# Altium PCB MGNGSQ4_Extender.PcbDoc
Units mil, origin at the board's own origin, x right, y up, seen from the top; angles counter-clockwise.
Board outline 2275 x 2755 mil, 4 copper layers (Top Layer, Internal Plane 1, Internal Plane 2, Bottom Layer), stack 30.634 mil thick; 5 components, 37 nets, 89 pads, 0 vias.
Unrouted connection lines stored in the file: 2.
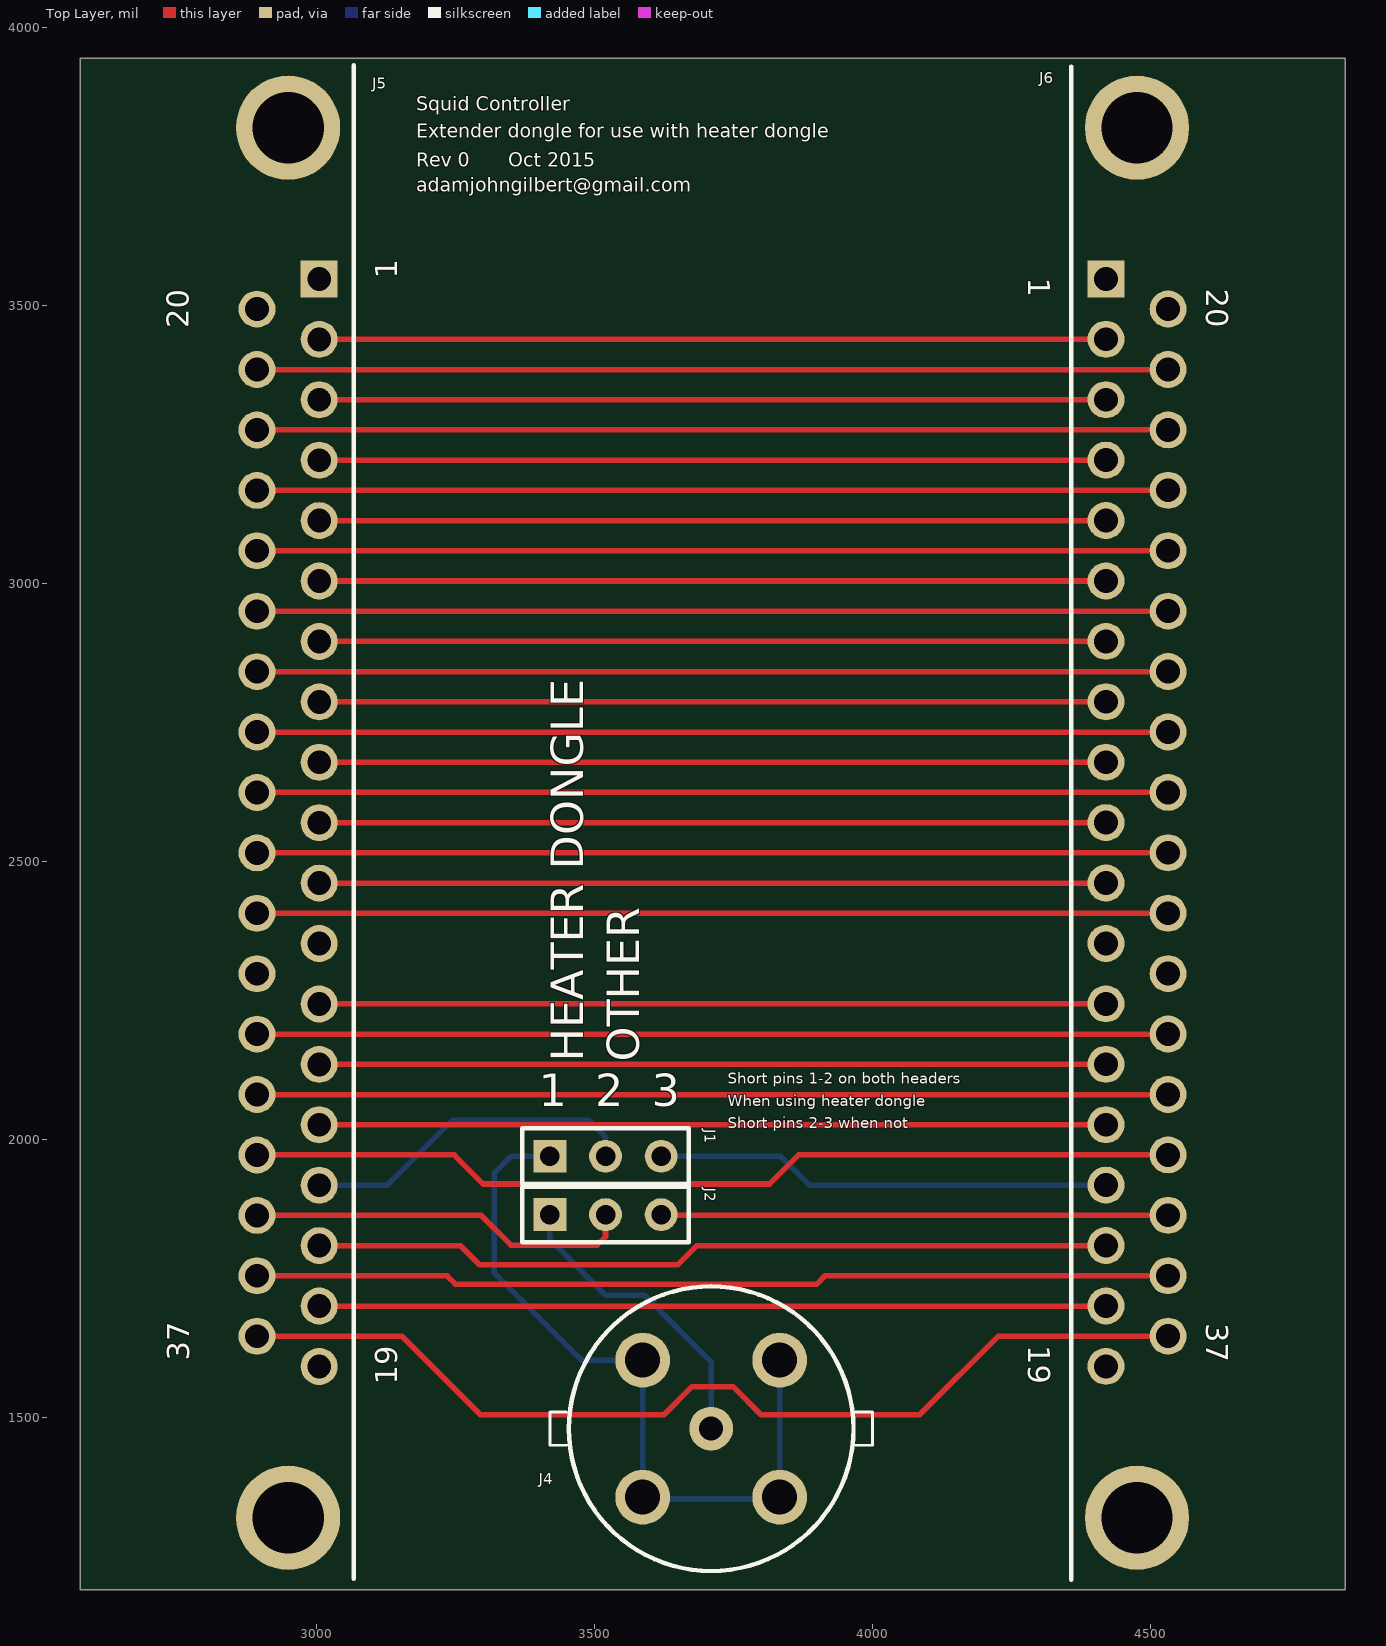
[diagram p0: Top Layer view]
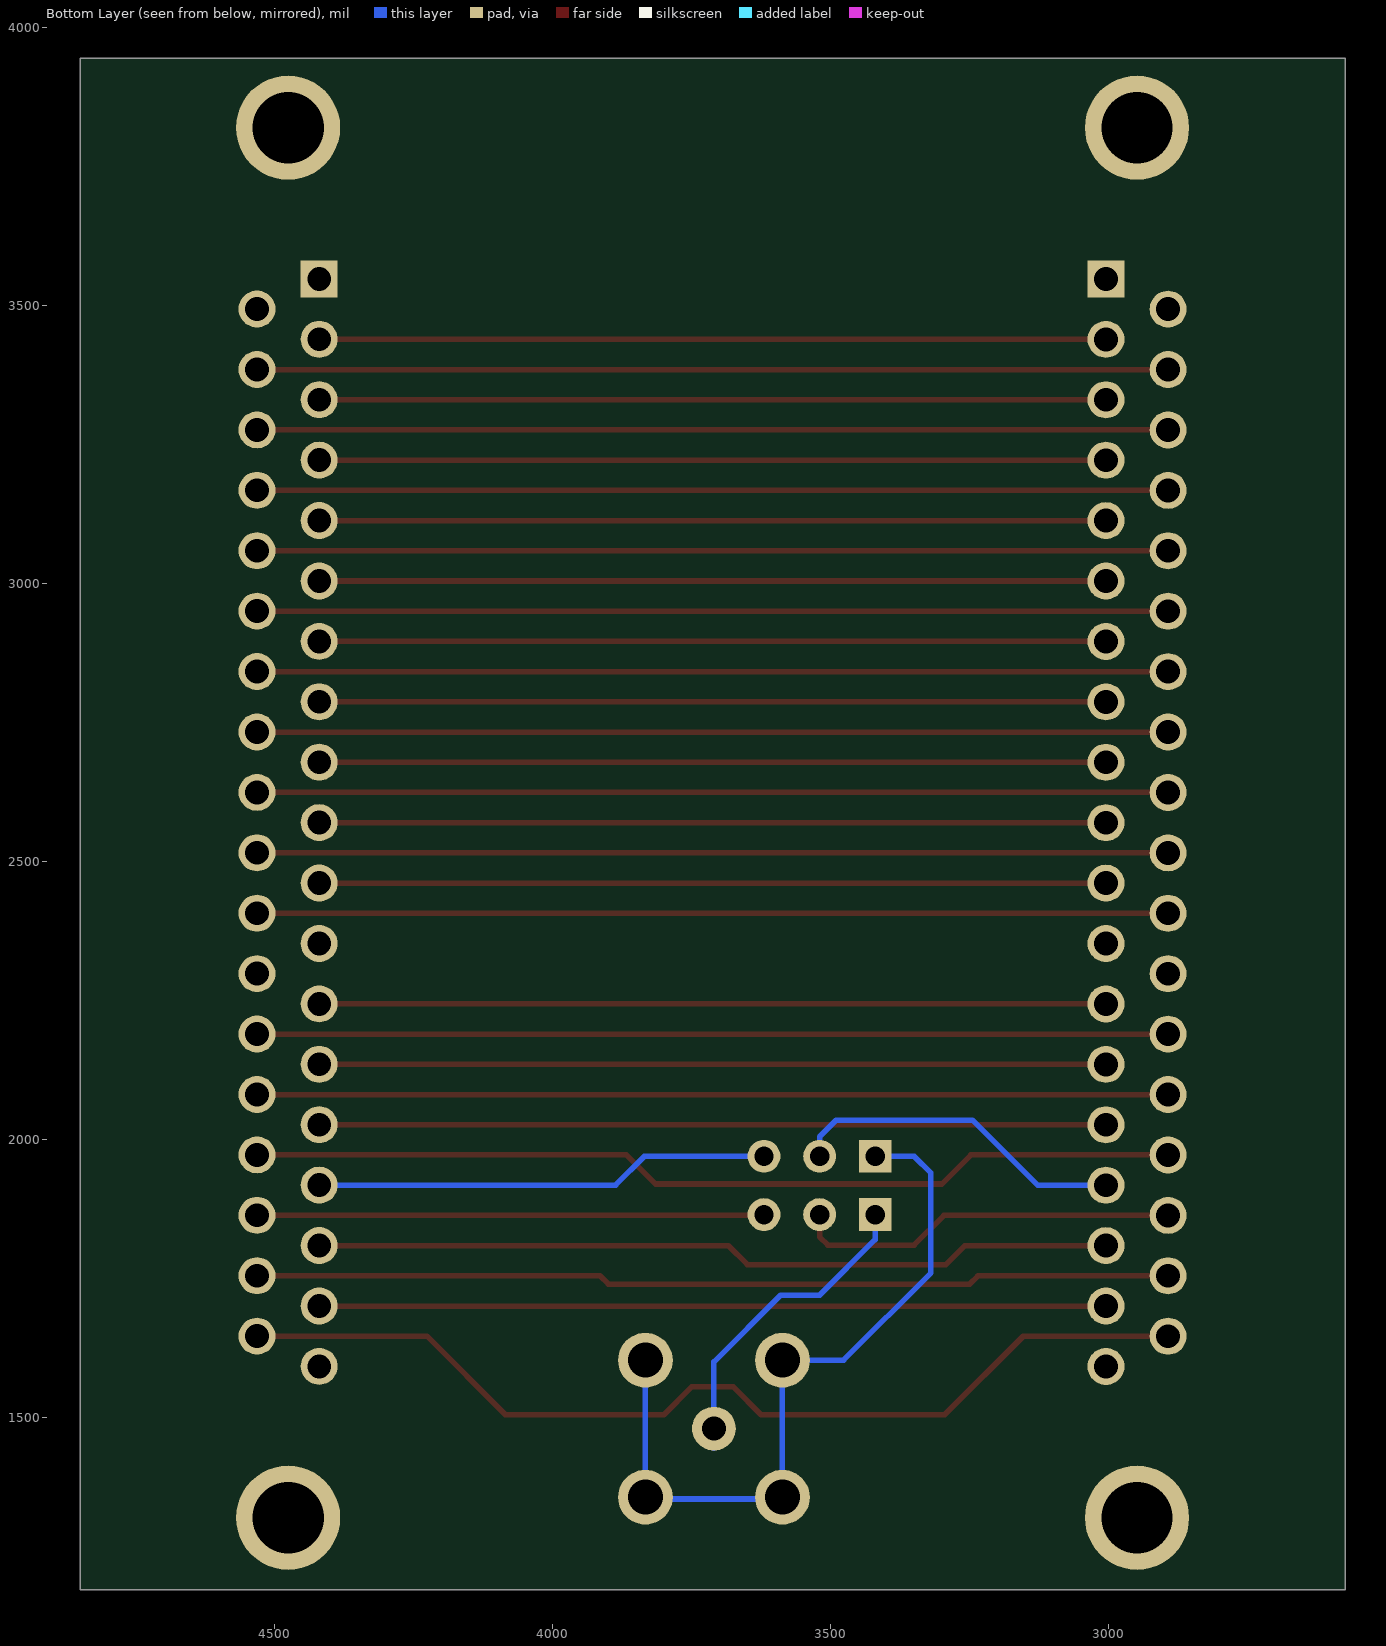
[diagram p1: Bottom Layer view, seen from below]
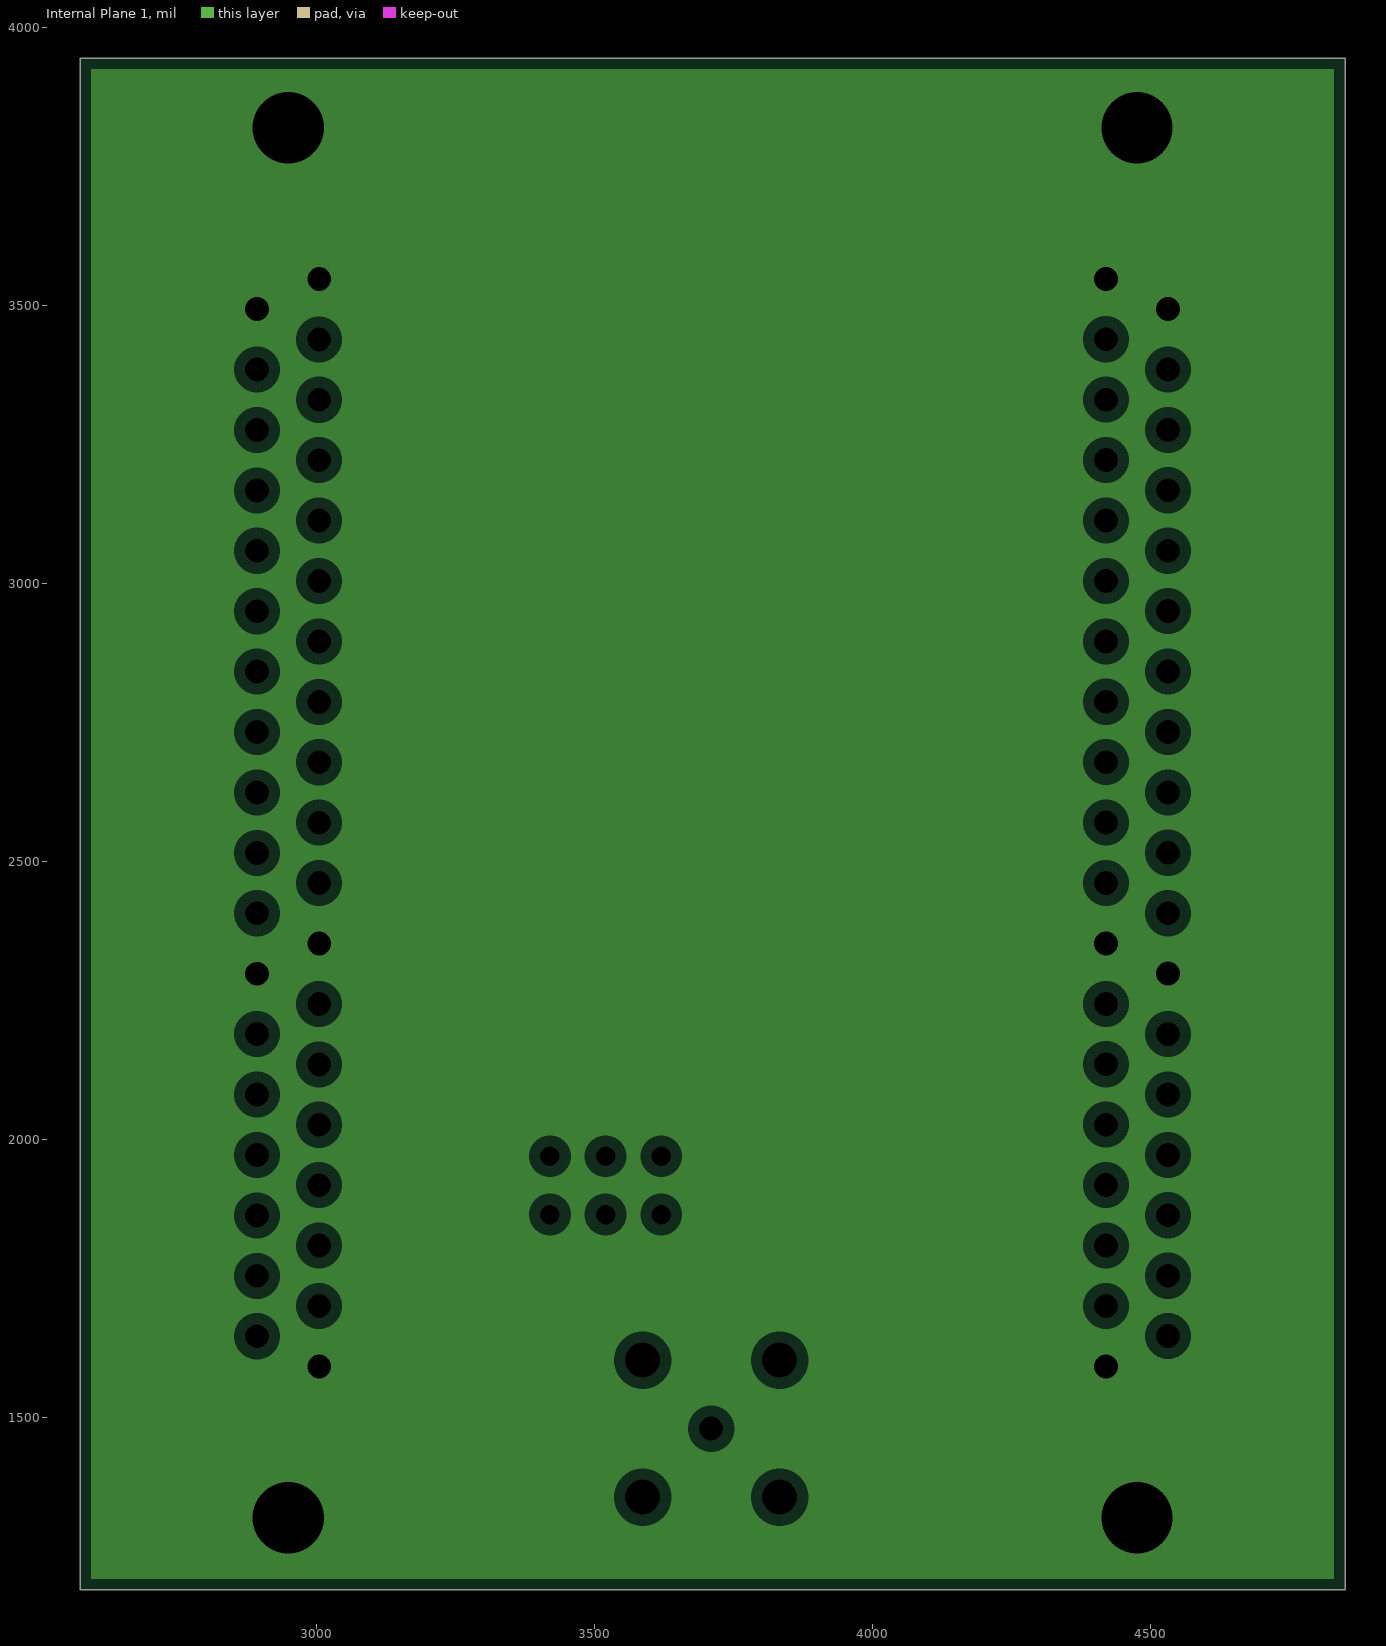
[diagram p2: Internal Plane 1, clearances drawn from the general rule]
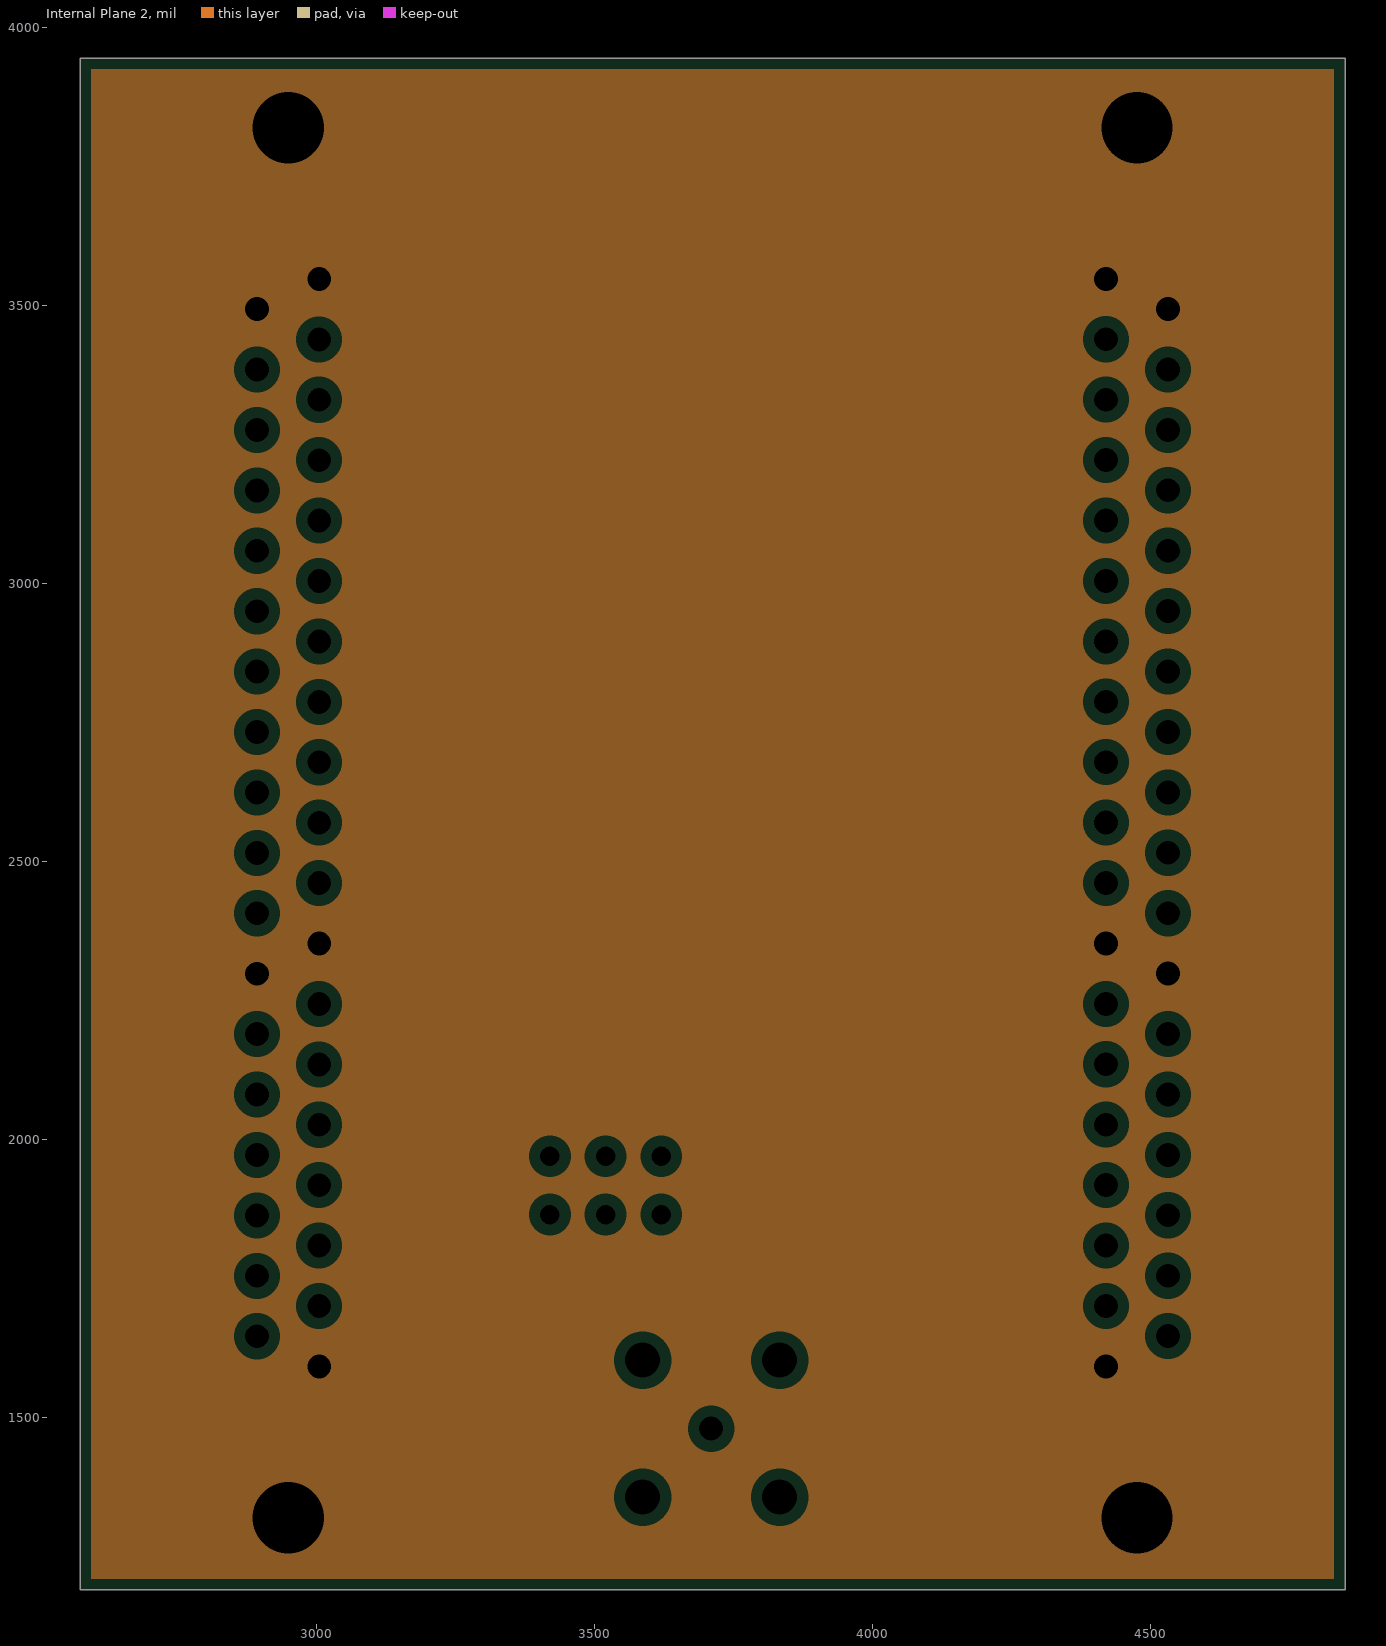
[diagram p3: Internal Plane 2, clearances drawn from the general rule]

## Layer stack, top to bottom
Top Solder: solder mask 0.4, Solder Resist, Dk 3.5
Top Layer: signal copper 1.4
Dielectric 1: core 10, FR-4, Dk 4.2
Internal Plane 1: plane copper 1.417, net GND
Dielectric 3: prepreg 5, Dk 4.2
Internal Plane 2: plane copper 1.417, net GND
Dielectric 2: core 10, Dk 4.2
Bottom Layer: signal copper 1.4
Bottom Solder: solder mask 0.4, Solder Resist, Dk 3.5

## Board outline
2575,1190 4850,1190 4850,3945 2575,3945

## Design rules (kind name [scope] priority, off if disabled: settings)
Clearance [All] p1: gap=10
HoleSize [All] p1: absolutevalues=TRUE maxlimit=200 minlimit=1 maxpercent=80.000 minpercent=20.000
PlaneClearance [All] p1: clearance=20
PlaneConnect [All] p1: planeconnectstyle=Relief reliefexpansion=20 reliefentries=4 reliefconductorwidth=10 reliefairgap=10
PolygonConnect [All] p1: connectstyle=Relief reliefconductorwidth=10 reliefentries=4 polygonreliefangle="90 Angle" airgapwidth=10
RoutingVias [All] p1: holewidth=28 width=50 viastyle="Through Hole" minholewidth=28 minwidth=50 maxholewidth=28 maxwidth=50
SolderMaskExpansion [All] p1: expansion=4
Width [All] p1: maxlimit=10 minlimit=10 preferedwidth=10
27 further rules are at their usual default settings.

## Components (designator, comment, footprint, x,y, rotation, side; value= is the part's Value field where it differs from the comment)
J1 "Header 3pin 0.1\"" HDR1X3 3420,1970 r0 top
J2 "Header 3pin 0.1\"" HDR1X3 3420,1865 r0 top
J4 "Vertical BNC" BNCVert 3710,1480 r180 top
J5 "DB37M" DSUB37-M 2949.09,3819.92 r90 top
J6 "DB37F" DSUB37-F 4420,2570 r270 top

## Footprints (in the part's own frame and the unit in brackets; to place one, negate y for a bottom-side part, rotate by r counter-clockwise, add the part's x,y. Pads: shape width x height; smd on the part's side, far side on the other; paste and mask are expansions set on the pad)
BNCVert [mm] "BNCVert"
  round 2.5 hole 1.6: 0(-3.13,3.13) 0(-3.13,-3.13) 0(3.13,3.13) 0(3.13,-3.13)
  round 2 hole 1.1: 1(0,0)
  silkscreen extent -7.37,-6.5 7.37,6.5
DSUB37-F [mm] "DSUB 37Pin Male"
  rect 1.69x1.69 hole 1.09: 1(-24.84,0)
  round 1.69 hole 1.09: 2(-22.08,0) 3(-19.32,0) 4(-16.56,0) 5(-13.8,0) 6(-11.04,0) 7(-8.28,0) 8(-5.52,0) 9(-2.76,0) 10(0,0) 11(2.76,0) 12(5.52,0) 13(8.28,0) 14(11.04,0) 15(13.8,0) 16(16.56,0) 17(19.32,0) 18(22.08,0) 19(24.84,0) 20(-23.461,2.84) 21(-20.701,2.84) 22(-17.941,2.84) 23(-15.181,2.84) 24(-12.421,2.84) 25(-9.661,2.84) 26(-6.901,2.84) 27(-4.141,2.84) 28(-1.381,2.84) 29(1.379,2.84) 30(4.139,2.84) 31(6.899,2.84) 32(9.659,2.84) 33(12.419,2.84) 34(15.179,2.84) 35(17.939,2.84) 36(20.699,2.84) 37(23.459,2.84)
  round 4.76 hole 3.26: 38(31.752,1.42) 39(-31.748,1.42)
  silkscreen extent -34.54,-1.58 34.6,-1.58
DSUB37-M [mm] "DSUB 37Pin Male"
  rect 1.69x1.69 hole 1.09: 1(-6.912,-1.42)
  round 1.69 hole 1.09: 2(-9.672,-1.42) 3(-12.432,-1.42) 4(-15.192,-1.42) 5(-17.952,-1.42) 6(-20.712,-1.42) 7(-23.472,-1.42) 8(-26.232,-1.42) 9(-28.992,-1.42) 10(-31.752,-1.42) 11(-34.512,-1.42) 12(-37.272,-1.42) 13(-40.032,-1.42) 14(-42.792,-1.42) 15(-45.552,-1.42) 16(-48.312,-1.42) 17(-51.072,-1.42) 18(-53.832,-1.42) 19(-56.592,-1.42) 20(-8.291,1.42) 21(-11.051,1.42) 22(-13.811,1.42) 23(-16.571,1.42) 24(-19.331,1.42) 25(-22.091,1.42) 26(-24.851,1.42) 27(-27.611,1.42) 28(-30.371,1.42) 29(-33.131,1.42) 30(-35.891,1.42) 31(-38.651,1.42) 32(-41.411,1.42) 33(-44.171,1.42) 34(-46.931,1.42) 35(-49.691,1.42) 36(-52.451,1.42) 37(-55.211,1.42)
  round 4.76 hole 3.26: 38(0,0) 39(-63.5,0)
  silkscreen extent -66.29,-3 2.84,-3
HDR1X3 [mm]
  rect 1.5x1.5 hole 0.889: 1(0,0)
  round 1.5 hole 0.889: 2(2.54,0) 3(5.08,0)
  silkscreen extent -1.27,-1.27 6.35,1.27

## Part data
J1 J2: library part Header3, "Header, 0.1\", 3-Pin straight"
J4: library part BNCVertical

## Nets (pads, with @x,y where several pads share a name; then routed paths per layer and width w, separated by ;. In a path a pad name is that pad's centre, name@x,y a point inside that pad or via, vN(x,y) a via of type N, cw(c..) or ccw(c..) an arc to the next point about the centre after c; other vN are vias at no path point)
GND: J5.1 J5.12 J5.19 J5.20 J5.31 J5.38 J5.39 J6.1 J6.12 J6.19 J6.20 J6.31 J6.38 J6.39
NetJ1_1: J1.1 J4.0 | length 1366.7
  Bottom Layer w10: J1.1 3350,1970 3320,1940 3320,1760 3476.77,1603.23 3586.77,1603.23 3586.77,1353.54 3833.23,1353.54 J4.0@3833.23,1600
NetJ1_2: J1.2 J5.16 | length 610.9
  Bottom Layer w10: J5.16 3127.88,1917.88 3245,2035 3490,2035 3520,2005 J1.2
NetJ1_3: J1.3 J6.16 | length 821.5
  Bottom Layer w10: J1.3 3835,1970 3886.97,1918.03 J6.16
NetJ2_1: J2.1 J4.1 | length 581.1
  Bottom Layer w10: J2.1 3420,1820 3520,1720 3590,1720 3710,1600 J4.1@3710,1445
NetJ2_2: J2.2 J5.35 | length 695.2
  Top Layer w10: J5.35 3296.42,1863.58 3350,1810 3505,1810 3520,1825 J2.2
NetJ2_3: J2.3 J6.35 | length 912.3
  Top Layer w10: J2.3 3621.26,1863.74 J6.35
NetJ5_2: J5.2 J6.2 | length 1415
  Top Layer w10: J5.2 J6.2@4420,3439.13
NetJ5_3: J5.3 J6.3 | length 1415
  Top Layer w10: J5.3 J6.3@4420,3330.47
NetJ5_4: J5.4 J6.4 | length 1415
  Top Layer w10: J5.4 J6.4@4420,3221.81
NetJ5_5: J5.5 J6.5 | length 1415
  Top Layer w10: J5.5 J6.5@4420,3113.15
NetJ5_6: J5.6 J6.6 | length 1415
  Top Layer w10: J5.6 J6.6@4420,3004.49
NetJ5_7: J5.7 J6.7 | length 1415
  Top Layer w10: J5.7 J6.7@4420,2895.83
NetJ5_8: J5.8 J6.8 | length 1415
  Top Layer w10: J5.8 J6.8@4420,2787.17
NetJ5_9: J5.9 J6.9 | length 1415
  Top Layer w10: J5.9 J6.9@4420,2678.51
NetJ5_10: J5.10 J6.10 | length 1415
  Top Layer w10: J5.10 J6.10@4420,2569.84
NetJ5_11: J5.11 J6.11 | length 1415
  Top Layer w10: J5.11 J6.11@4420,2461.18
NetJ5_13: J5.13 J6.13 | length 1415
  Top Layer w10: J5.13 J6.13@4420,2243.86
NetJ5_14: J5.14 J6.14 | length 1415
  Top Layer w10: J5.14 J6.14@4420,2135.2
NetJ5_15: J5.15 J6.15 | length 1415
  Top Layer w10: J5.15 J6.15@4420,2026.54
NetJ5_17: J5.17 J6.17 | length 1443.3
  Top Layer w10: J5.17 3258.71,1809.21 3292.92,1775 3650,1775 3684.21,1809.21 J6.17@4420,1809.21
NetJ5_18: J5.18 J6.18 | length 1415
  Top Layer w10: J5.18 J6.18@4420,1700.55
NetJ5_21: J5.21 J6.21 | length 1638.6
  Top Layer w10: J5.21 J6.21@4531.81,3384.84
NetJ5_22: J5.22 J6.22 | length 1638.6
  Top Layer w10: J5.22 J6.22@4531.81,3276.18
NetJ5_23: J5.23 J6.23 | length 1638.6
  Top Layer w10: J5.23 J6.23@4531.81,3167.52
NetJ5_24: J5.24 J6.24 | length 1638.6
  Top Layer w10: J5.24 J6.24@4531.81,3058.86
NetJ5_25: J5.25 J6.25 | length 1638.6
  Top Layer w10: J5.25 J6.25@4531.81,2950.2
NetJ5_26: J5.26 J6.26 | length 1638.6
  Top Layer w10: J5.26 J6.26@4531.81,2841.54
NetJ5_27: J5.27 J6.27 | length 1638.6
  Top Layer w10: J5.27 J6.27@4531.81,2732.88
NetJ5_28: J5.28 J6.28 | length 1638.6
  Top Layer w10: J5.28 J6.28@4531.81,2624.21
NetJ5_29: J5.29 J6.29 | length 1638.6
  Top Layer w10: J5.29 J6.29@4531.81,2515.55
NetJ5_30: J5.30 J6.30 | length 1638.6
  Top Layer w10: J5.30 J6.30@4531.81,2406.89
NetJ5_32: J5.32 J6.32 | length 1638.6
  Top Layer w10: J5.32 J6.32@4531.81,2189.57
NetJ5_33: J5.33 J6.33 | length 1638.6
  Top Layer w10: J5.33 J6.33@4531.81,2080.91
NetJ5_34: J5.34 J6.34 | length 1682
  Top Layer w10: J5.34 3247.75,1972.25 3300,1920 3815,1920 3867.4,1972.4 J6.34
NetJ5_36: J5.36 J6.36 | length 1651
  Top Layer w10: J5.36 3235.08,1754.92 3250,1740 3900,1740 3915.08,1755.08 J6.36
NetJ5_37: J5.37 J6.37 | length 1797.1
  Top Layer w10: J5.37 3153.74,1646.26 3295,1505 3625,1505 3675,1555 3750,1555 3800,1505 4085,1505 4226.42,1646.42 J6.37

## Polygon pours and split planes (outlines as drawn)
GND on Internal Plane 1 (split plane): 4829.9,1210.1 2595.1,1210.1 2595.1,3924.9 4829.9,3924.9
GND on Internal Plane 2 (split plane): 4829.9,1210.1 2595.1,1210.1 2595.1,3924.9 4829.9,3924.9

## Silkscreen, mask and mechanical layers (free items; w line width, h text height)
Top Overlay:
  text "Squid Controller" at 3180,3850 h25
  text "Extender dongle for use with heater dongle" at 3180,3801.67 h25
  text "Rev 0" at 3180,3750 h25
  text "Oct 2015" at 3345,3750 h25
  text "adamjohngilbert@gmail.com" at 3180,3705 h25
  text "HEATER DONGLE" at 3500,2140 h100 r90
  text "OTHER" at 3600,2140 h100 r90
  text "Short pins 1-2 on both headers" at 3740,2100 h20
  text "When using heater dongle" at 3740,2060 h20
  text "1  2  3" at 3400,2040 h100
  text "Short pins 2-3 when not" at 3740,2020 h20
Mechanical 1:
  the board outline again, w5

## Text inside footprints (layer, text, board x,y; h text height)
J5: Top Overlay "37" at 2770.94,1602.03 h40 r90; Top Overlay "1" at 3144.96,3548.58 h40 r90; Top Overlay "19" at 3145.08,1559.17 h40 r90; Top Overlay "20" at 2770.08,3459.17 h40 r90
J6: Top Overlay "20" at 4600,3530 h40 r270; Top Overlay "19" at 4280,1630 h40 r270; Top Overlay "1" at 4280,3550 h40 r270; Top Overlay "37" at 4600,1670 h40 r270